# Altium PCB Glucometer-I.C.-Amp Test- V1.PcbDoc
Units mm, origin at the board's own origin, x right, y up, seen from the top; angles counter-clockwise.
Board outline 40.28 x 22.25 mm, 2 copper layers (Top Layer, Bottom Layer); 11 components, 11 nets, 52 pads, 7 vias.
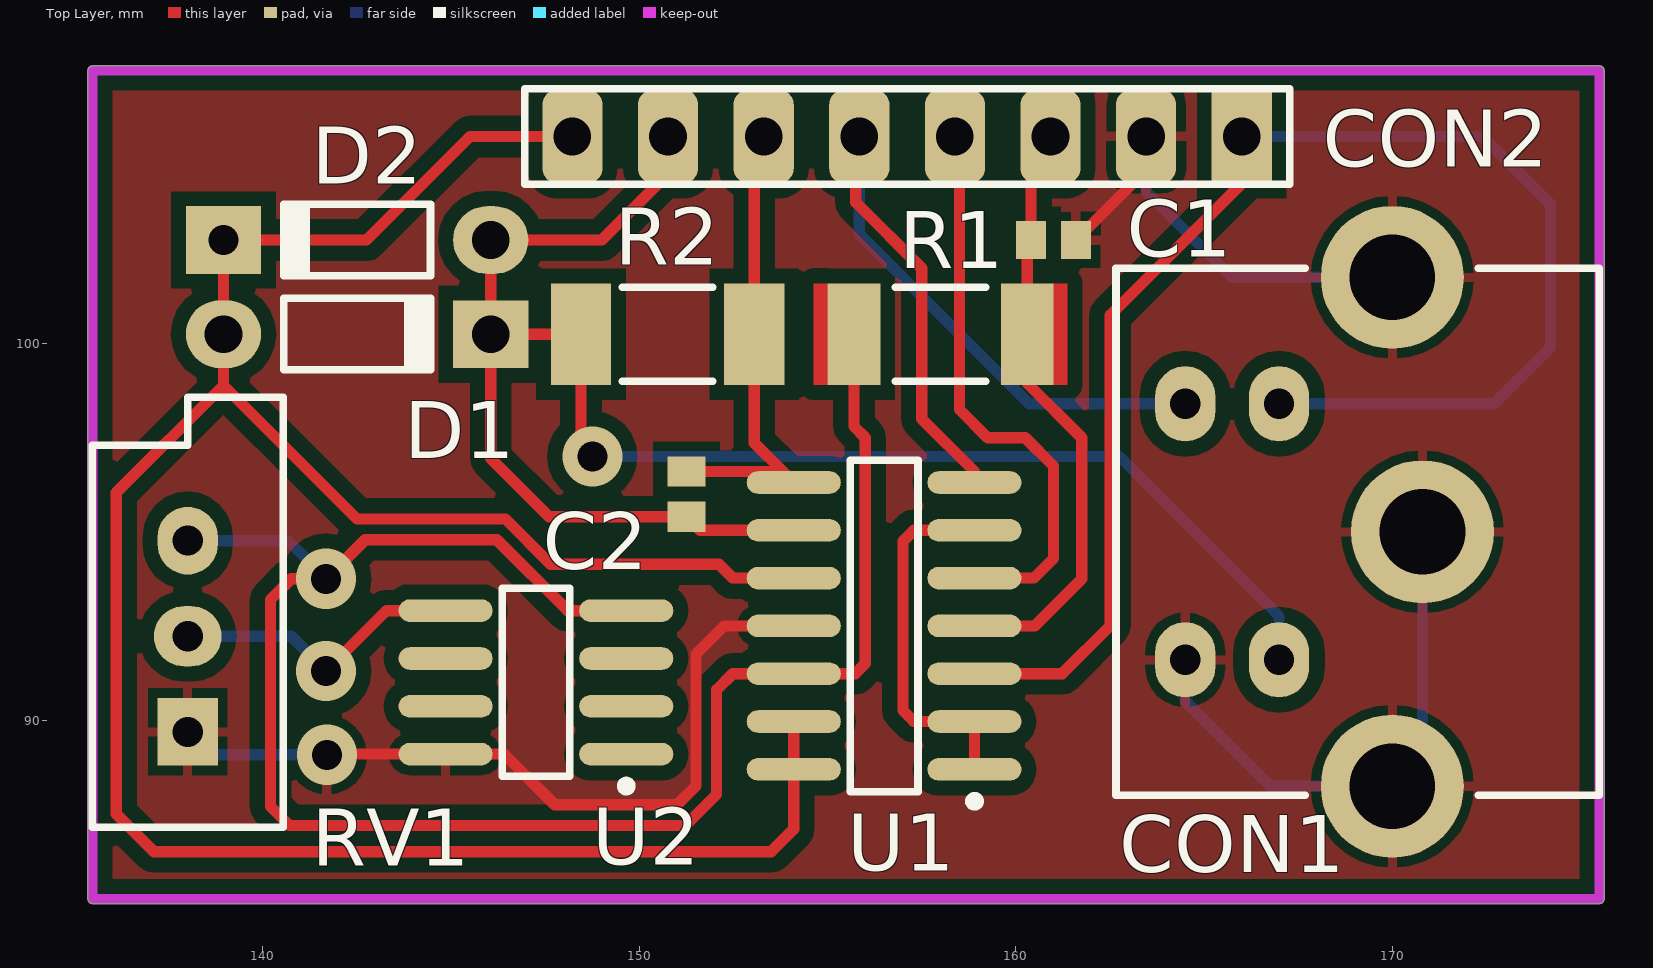
[diagram p0: Top Layer view]
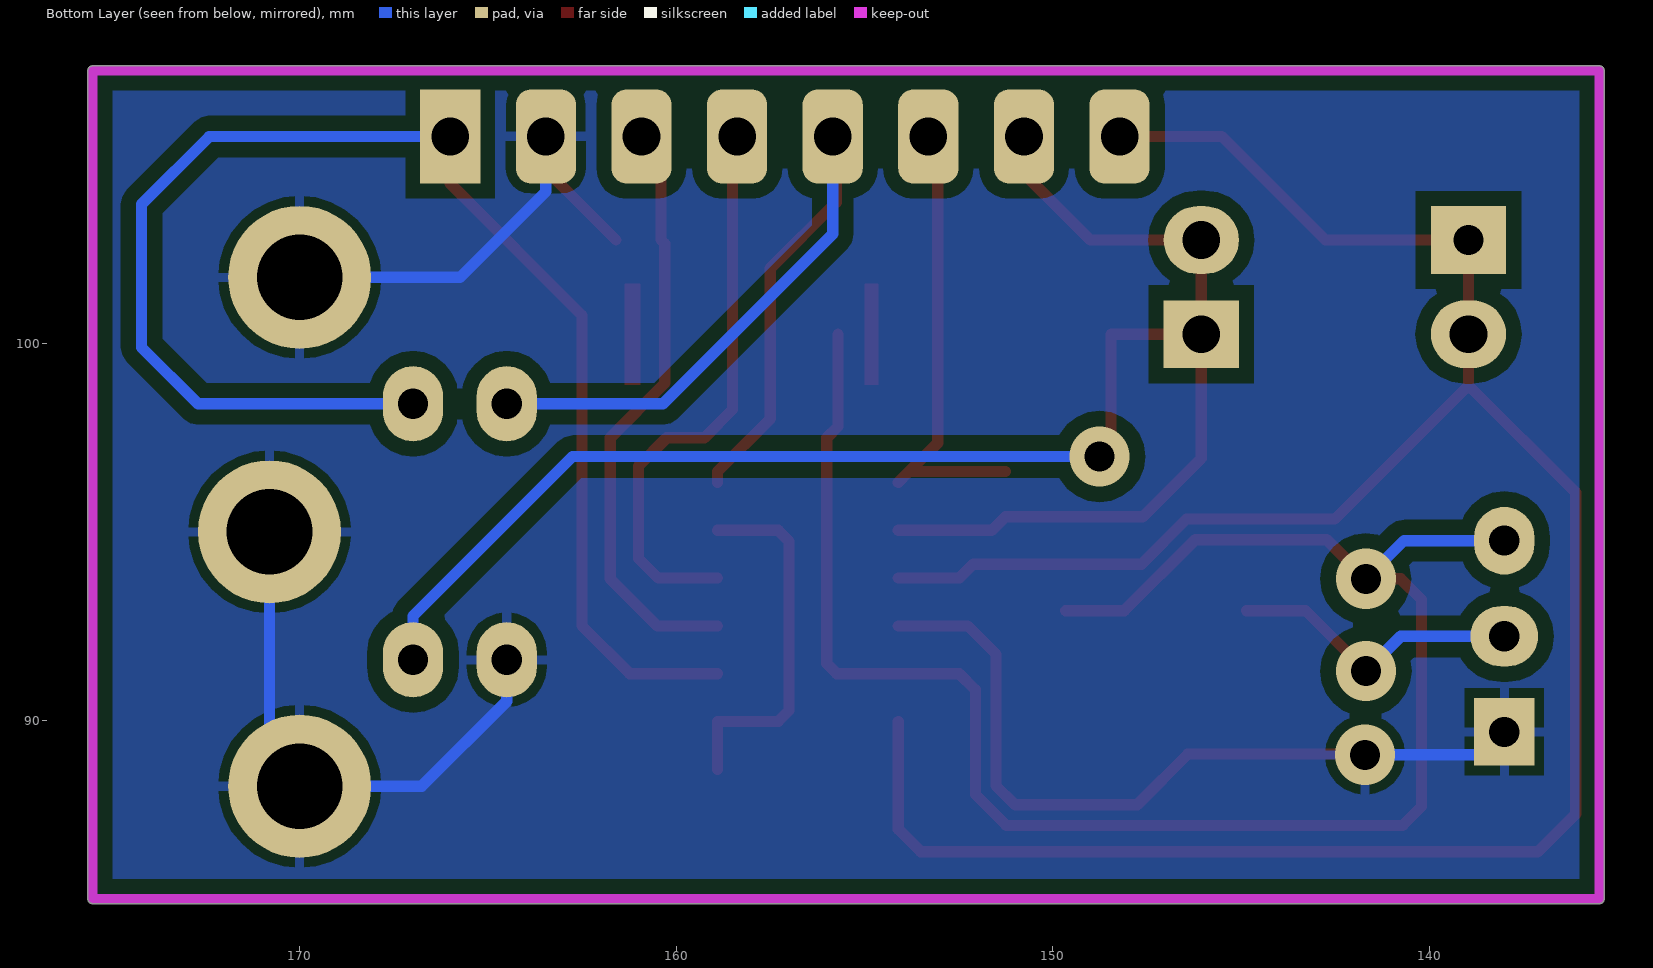
[diagram p1: Bottom Layer view, seen from below]

## Layer stack, top to bottom
Top Layer: signal copper 0.0356
Dielectric: dielectric 0.32, FR-4, Dk 4.8
Bottom Layer: signal copper 0.0356

## Board outline
135.348,85.25 ccw(c135.475,85.25) 135.475,85.123 175.5,85.123 ccw(c175.5,85.25) 175.627,85.25 175.627,107.25 ccw(c175.5,107.25) 175.5,107.377 135.475,107.377 ccw(c135.475,107.25) 135.348,107.25

## Design rules (kind name [scope] priority, off if disabled: settings)
AssemblyTestPointUsage AssemblyTestPointUsage_1 [All] p2:
AssemblyTestpoint AssemblyTestpoint_1 [All] p2: testpointundercomponent=TRUE minsize=1.016 maxsize=2.54 preferedsize=1.524 minholesize=0 maxholesize=1.016 preferedholesize=0.813 testpointgrid=0.025 usegrid=TRUE gridtolerance=0 allowsidetop=TRUE allowsidebottom=TRUE
Clearance [All] p1: gap=0.25
ComponentClearance ComponentClearance_1 [All] p2: gap=0.254 collisioncheckmode=3 verticalgap=0.254 showdistances=FALSE
DiffPairsRouting DiffPairsRouting_1 [All] p2: maxlimit=0.254 minlimit=0.254 mostfreqgap=0.254 maxuncoupledlength=12.7
FabricationTestPointUsage TestPointUsage [All] p2: valid=0 allowmultiple=FALSE
FabricationTestpoint Testpoint [All] p2: side=3 testpointundercomponent=TRUE minsize=1.016 maxsize=2.54 preferedsize=1.524 minholesize=0 maxholesize=1.016 preferedholesize=0.813 testpointgrid=0.025 allowsidetop=TRUE allowsidebottom=TRUE usegrid=TRUE gridtolerance=0
FanoutControl Fanout_LCC [IsLCC] p1: bgadir=Out bgaviamode=Centered fanoutstyle=Auto fanoutdirection=Alternating viagrid=0.025 // Fanout_LCC (Default Rule)
FanoutControl Fanout_BGA [IsBGA] p2: bgadir=Out bgaviamode=Centered fanoutstyle=Auto fanoutdirection=Alternating viagrid=0.025 // Fanout_BGA (Default Rule)
FanoutControl Fanout_Default [All] p4: bgadir=Out bgaviamode=Centered fanoutstyle=Auto fanoutdirection=Alternating viagrid=0.025 // Fanout_Default (Default Rule)
FanoutControl Fanout_Small [(CompPinCount < 5)] p5: bgadir=Out bgaviamode=Centered fanoutstyle=Auto fanoutdirection=OutThenIn viagrid=0.025 // Fanout_Small (Default Rule)
FanoutControl Fanout_BGA_1 [IsBGA] p6: bgadir=Out bgaviamode=Centered fanoutstyle=Auto fanoutdirection=Alternating viagrid=0.025 // Fanout_BGA (Default Rule)
FanoutControl Fanout_LCC_1 [IsLCC] p7: bgadir=Out bgaviamode=Centered fanoutstyle=Auto fanoutdirection=Alternating viagrid=0.025 // Fanout_LCC (Default Rule)
FanoutControl Fanout_SOIC_1 [IsSOIC] p8: bgadir=Out bgaviamode=Centered fanoutstyle=Auto fanoutdirection=Alternating viagrid=0.025 // Fanout_SOIC (Default Rule)
FanoutControl Fanout_Small_1 [(CompPinCount < 5)] p9: bgadir=Out bgaviamode=Centered fanoutstyle=Auto fanoutdirection=OutThenIn viagrid=0.025 // Fanout_Small (Default Rule)
FanoutControl Fanout_Default_1 [All] p10: bgadir=Out bgaviamode=Centered fanoutstyle=Auto fanoutdirection=Alternating viagrid=0.025 // Fanout_Default (Default Rule)
Height Height_1 [All] p2: minheight=0 maxheight=25.4 prefheight=12.7
HoleSize [All] p1: absolutevalues=TRUE maxlimit=5 minlimit=0.025 maxpercent=80.000 minpercent=20.000
HoleSize HoleSize_1 [All] p2: absolutevalues=TRUE maxlimit=5 minlimit=0.025 maxpercent=80.000 minpercent=20.000
HoleToHoleClearance HoleToHoleClearance_1 [All] p2: gap=0.254 allowstackedmicrovias=TRUE
LayerPairs LayerPairs_1 [All] p2: enforce=TRUE
MinimumSolderMaskSliver MinimumSolderMaskSliver_1 [All] p2: minsoldermaskwidth=0.254
NetAntennae NetAntennae_1 [All] p2: netantennaetolerance=0
PasteMaskExpansion PasteMaskExpansion_1 [All] p2: expansion=0
PlaneClearance PlaneClearance_1 [All] p2: clearance=0.508
PolygonConnect [All] p1: connectstyle=Relief reliefconductorwidth=0.254 reliefentries=4 polygonreliefangle="90 Angle" airgapwidth=0.254
PolygonConnect PolygonConnect_1 [All] p2: connectstyle=Relief reliefconductorwidth=0.254 reliefentries=4 polygonreliefangle="90 Angle" airgapwidth=0.254
RoutingPriority RoutingPriority_1 [All] p2: routingpriority=0
RoutingTopology RoutingTopology_1 [All] p2: topology=Shortest
RoutingVias [All] p1: holewidth=0.8 width=1.5 viastyle="Through Hole" minholewidth=0.7 minwidth=1 maxholewidth=1 maxwidth=2
ShortCircuit ShortCircuit_1 [All] p2: allowed=FALSE
SilkToSilkClearance SilkToSilkClearance_1 [All] p2: silktosilkclearance=0.254
SilkToSolderMaskClearance SilkscreenOverComponentPads [IsPad] p2: minsilkscreentomaskgap=0.254 clearancetoexposedcopper=TRUE
SolderMaskExpansion [All] p1: expansion=0.102
SolderMaskExpansion SolderMaskExpansion_1 [All] p2: expansion=0.102
UnRoutedNet UnRoutedNet_1 [All] p2:
Width [All] p1: maxlimit=5 minlimit=0.25 preferedwidth=0.3 minimp=50.000000 maximp=50.000000 favimp=50.000000
23 further rules are at their usual default settings.

## Components (designator, comment, footprint, x,y, rotation, side; value= is the part's Value field where it differs from the comment)
C1 "Cap2" CAPC1005N 161,102.75 r0 top
C2 "Cap2" CAPC1005N 151.25,96 r90 top
CON1 "" CDIN2.6-3H4A 175.5,95 r180 top
CON2 "Header 8" HDR1X8 166,105.5 r180 top
D1 "1N4148" DO-35#1 142.5,100.25 r0 top
D2 "1N4148" DO-35#2 142.5,102.75 r180 top
R1 "Res1" RESC5025N#1 158,100.25 r0 top
R2 "Res1" RESC5025N#2 150.75,100.25 r180 top
RV1 "RPot" VR5 138,92.225 r90 top
U1 "LMC6044IN" M14A_N 156.5,92.5 r180 top
U2 "LM385BM" M08A_N 147.25,91 r180 top

## Footprints (in the part's own frame and the unit in brackets; to place one, negate y for a bottom-side part, rotate by r counter-clockwise, add the part's x,y. Pads: shape width x height; smd on the part's side, far side on the other; paste and mask are expansions set on the pad)
CAPC1005N [mm] "Chip Capacitor, Body 1.0x0.5mm, IPC Medium Density"
  rect 0.8x1 smd: 1(-0.6,0) 2(0.6,0)
  body extent -0.55,-0.3 0.55,0.3, height 0.6
CDIN2.6-3H4A [mm] "Connector; Circular DIN, Thru-Hole; 4 Position; Right Angle; Pitch 2.1/2.6 mm; Body 14 x 12.84 x 13 mm (WxTxH), Shielded, Special PCB Retention"
  oval 1.6x2 hole 0.8: 1(8.51,-3.4) 2(8.51,3.4) 3(11,-3.4) 4(11,3.4)
  round 3.8 hole 2.28: MH1(5.5,-6.76) MH2(4.7,0) MH3(5.5,6.76)
  silkscreen extent 0,-7 12.84,7, body extent 0,-7 12.84,7, height 13
DO-35#1 [mm] "Diode, Axial; Body 3.8 x 1.9 mm (LxDia. max), Lead Dia. 0.53 mm (max)"
  oval 2x1.8 hole 1: 1(-3.55,0)
  rect 2x1.8 hole 1: 2(3.55,0)
  silkscreen extent -1.95,-0.95 2.05,0.95
DO-35#2 [mm] "Diode, Axial; Body 3.8 x 1.9 mm (LxDia. max), Lead Dia. 0.53 mm (max)"
  oval 2x1.8 hole 1: 1(-3.55,0)
  rect 2x1.8 hole 0.8: 2(3.55,0)
  silkscreen extent -1.95,-0.95 2.05,0.95
HDR1X8 [mm] "Connector; Header; 8 Position"
  rect 1.6x2.5 hole 1: 1(0,0)
  rrect50% 1.6x2.5 hole 1: 2(2.54,0) 3(5.08,0) 4(7.62,0) 5(10.16,0) 6(12.7,0) 7(15.24,0) 8(17.78,0)
  silkscreen extent -1.27,-1.27 19.05,1.27
M08A_N [mm] "SOIC, 8-Leads, Body 4.9x3.9mm, Pitch 1.27mm, IPC Medium Density"
  oval 2.5x0.6 smd: 1(-2.4,1.905) 2(-2.4,0.635) 3(-2.4,-0.635) 4(-2.4,-1.905) 5(2.4,-1.905) 6(2.4,-0.635) 7(2.4,0.635) 8(2.4,1.905)
  silkscreen extent -2.53,-2.5 0.9,2.88, body extent -2,-2.5 2,2.5, height 1.75
M14A_N [mm] "SOIC, 14-Leads, Body 8.6x3.9mm, Pitch 1.27mm, IPC Medium Density"
  oval 2.5x0.6 smd: 1(-2.4,3.81) 2(-2.4,2.54) 3(-2.4,1.27) 4(-2.4,0) 5(-2.4,-1.27) 6(-2.4,-2.54) 7(-2.4,-3.81) 8(2.4,-3.81) 9(2.4,-2.54) 10(2.4,-1.27) 11(2.4,0) 12(2.4,1.27) 13(2.4,2.54) 14(2.4,3.81)
  silkscreen extent -2.53,-4.4 0.9,4.78, body extent -2,-4.38 2,4.38, height 1.75
RESC5025N#1 [mm] "Chip Resistor, Body 5.0x2.5mm, IPC Medium Density"
  rect 1.4x2.7 smd: 1(-2.3,0) 2(2.3,0)
  silkscreen extent -1.2,-1.25 1.2,1.25, body extent -2.58,-1.33 2.58,1.33, height 0.71
RESC5025N#2 [mm] "Chip Resistor, Body 5.0x2.5mm, IPC Medium Density"
  rect 1.6x2.7 smd: 1(-2.3,0) 2(2.3,0)
  silkscreen extent -1.2,-1.25 1.2,1.25, body extent -2.58,-1.33 2.58,1.33, height 0.71
VR5 [mm] "Thru-Hole; 3 Leads"
  rect 1.8x1.6 hole 0.8: 1(-2.54,0)
  oval 1.6x1.8 hole 0.8: 2(0,0)
  oval 1.8x1.6 hole 0.8: 3(2.54,0)
  silkscreen extent -5.08,-2.54 6.35,2.54

## Part data
C1 C2: "Capacitor"
CON1: library part "MiniDin 4Pins - SuperVideo", "MiniDin 4 Pins"
CON2: "Header, 8-Pin"
D1 D2: "High Conductance Fast Diode"
R1 R2: "Resistor"
RV1: "Potentiometer"
U1: "CMOS Quad Micropower Operational Amplifier, 14-pin MDIP"
U2: "Adjustable Micropower Voltage Reference, 8-pin Narrow SOIC"

## Via types
v1: diameter 1.6, hole 0.8, Top Layer to Bottom Layer, 4 vias
v2: diameter 1.27, hole 0.711, Top Layer to Bottom Layer, 3 vias

## Nets (pads, with @x,y where several pads share a name; then routed paths per layer and width w, separated by ;. In a path a pad name is that pad's centre, name@x,y a point inside that pad or via, vN(x,y) a via of type N, cw(c..) or ccw(c..) an arc to the next point about the centre after c; other vN are vias at no path point)
5V: C1.1 CON2.3 R1.2 U1.4 | length 16
  Top Layer w0.3: U1.4 160.5,92.5 161.75,93.75 161.75,97.5 160.3,98.95 R1.2 160.3,102.65 C1.1 160.4,104.98 CON2.3
GND: C1.2 CON1.4 CON1.MH1 CON1.MH2 CON1.MH3 CON2.2 RV1.1 U1.11 U2.8 | length 48
  Top Layer w0.3: v1@141.7,89.095 U2.8 146.405,89.095 147.75,87.75 151,87.75 151.5,88.25 151.5,91.75 152.25,92.5 U1.11 ; C1.2 163.46,104.61 v2(163.46,105.5)
  Bottom Layer w0.3: RV1.1 138.61,89.075 v1(141.7,89.075) ; v2(163.46,105.5) 163.46,104.04 165.74,101.76 CON1.MH1 ; CON1.4 164.5,90.5 166.76,88.24 CON1.MH3 170.8,89.04 CON1.MH2
NetC2_1: C2.1 CON1.2 CON2.7 D1.2 D2.1 R2.2 U1.9 | length 48
  Top Layer w0.3: v1(148.75,97) 148.45,97.3 R2.2 D1.2 ; CON2.7 150.76,104.51 149,102.75 D2.1 D1.2 ; U1.9 151.61,95.04 C2.1 147.6,95.4 146.05,96.95 D1.2
  Bottom Layer w0.3: v1(148.75,97) 162.75,97 166.99,92.76 CON1.2
NetC2_2: C2.2 CON2.6 R2.1 U1.8 | length 12.3
  Top Layer w0.3: C2.2 U1.8@153.81,96.6 ; CON2.6 153.05,105.25 R2.1 153.05,97.36 U1.8@153.81,96.6 ; U1.8 U1.8@153.81,96.6
NetCON1_1: CON1.1 CON2.1 U1.3 | length 39.2
  Top Layer w0.3: U1.3 161.23,91.23 162.5,92.5 162.5,100.75 166,104.25 v2(166,105.5)
  Bottom Layer w0.3: v2(166,105.5) 172.4,105.5 174.2,103.7 174.2,99.9 172.7,98.4 CON1.1
NetCON1_3: CON1.3 CON2.5 U1.7 | length 23.7
  Top Layer w0.3: v2(155.84,105.5) 155.75,105.41 155.75,103.75 157.5,102 157.5,98 158.9,96.6 U1.7
  Bottom Layer w0.3: v2(155.84,105.5) 155.84,102.91 160.35,98.4 CON1.3
NetCON2_4: CON2.4 U1.5 | length 15.2
  Top Layer w0.3: CON2.4 158.5,105.38 158.5,98.25 159.25,97.5 160.25,97.5 161,96.75 161,94.29 160.48,93.77 U1.5
NetR1_1: R1.1 RV1.3 U1.12 U2.4 | length 48.8
  Top Layer w0.3: U2.4 148.095,92.905 146.21,94.79 142.715,94.79 v1(141.675,93.75) 140.75,93.75 140.2,93.2 140.2,87.7 140.7,87.2 151.228,87.2 152.05,88.022 152.05,90.8 152.48,91.23 U1.12 155.73,91.23 156,91.5 156,97.5 155.7,97.8 R1.1
  Bottom Layer w0.3: RV1.3 140.66,94.765 v1(141.675,93.75)
NetRV1_3: RV1.2 U2.5 | length 7.9
  Top Layer w0.3: v1(141.675,91.3) 143.28,92.905 U2.5
  Bottom Layer w0.3: RV1.2 140.75,92.225 v1(141.675,91.3)
NetU1_1: U1.1 U1.2 U1.6 | length 9.8
  Top Layer w0.3: U1.1 U1.2 157.29,89.96 157,90.25 157,94.75 157.29,95.04 U1.6
VGND: CON2.8 D1.1 D2.2 U1.10 U1.13 U1.14 | length 65.6
  Top Layer w0.3: CON2.8 145.5,105.5 142.75,102.75 D2.2 D1.1 138.95,98.89 ; U1.13 U1.14 154.1,87.1 153.5,86.5 137.102,86.5 136.1,87.502 136.1,96.04 138.95,98.89 ; U1.10 152.48,93.77 152.111,94.139 147.639,94.139 146.438,95.34 142.5,95.34 141.09,96.75 138.95,98.89
pads on no net: U2.1 U2.2 U2.3 U2.6 U2.7

## Polygon pours and split planes (outlines as drawn)
GND on Bottom Layer "Bottom Layer-No Net" (solid, pour order 16): 175.5,107.25 135.475,107.25 135.475,85.25 175.5,85.25 175.5,107.25
GND on Top Layer "Bottom Layer-No Net" (solid, pour order 18): 175.5,107.25 135.475,107.25 135.475,85.25 175.5,85.25 175.5,107.25

## Keep-outs
Keep-Out Layer:
  lines w0.254: 135.475,85.25 135.475,107.25 175.5,107.25 175.5,85.25 135.475,85.25

## Other copper
Top Layer:
  rectangle net 5V: 160.95,98.9 161.375,101.6
  rectangle net NetR1_1: 154.625,98.9 155,101.6

## Silkscreen, mask and mechanical layers (free items; w line width, h text height)
Mechanical 16:
  lines w0.127: 0,53.975 5.08,53.975 ; 0,107.95 5.08,107.95 ; 0,161.925 5.08,161.925 ; 69.85,0 69.85,5.08 ; 69.85,210.82 69.85,215.9 ; 139.7,0 139.7,5.08 ; 139.7,210.82 139.7,215.9 ; 209.55,0 209.55,5.08 ; 209.55,210.82 209.55,215.9 ; 274.32,53.975 279.4,53.975 ; 274.32,107.95 279.4,107.95 ; 274.32,161.925 279.4,161.925 ; 0,0 279.4,0 279.4,215.9 0,215.9 0,0 ; 5.08,5.08 5.08,210.82 274.32,210.82 274.32,5.08 5.08,5.08
  text "1" at 34.324,212.471 h1.78
  text "2" at 104.191,212.471 h1.78
  text "3" at 173.914,212.471 h1.78
  text "4" at 243.789,212.471 h1.78
  text "A" at 1.905,186.614 h1.78
  text "A" at 276.225,186.614 h1.78
  text "B" at 1.905,132.639 h1.78
  text "B" at 276.225,132.639 h1.78
  text "C" at 1.905,78.664 h1.78
  text "C" at 276.225,78.664 h1.78
  text "D" at 1.905,24.816 h1.78
  text "D" at 276.225,24.816 h1.78
  text "1" at 34.324,1.651 h1.78
  text "2" at 104.191,1.651 h1.78
  text "3" at 173.914,1.651 h1.78
  text "4" at 243.789,1.651 h1.78

## Dimensions
135.475,107.25 to 175.5,107.25 on Keep-Out Layer
135.475,107.25 to 135.475,85.25 on Keep-Out Layer

## Text inside footprints (layer, text, board x,y; h text height)
CON1: Mechanical 1 "PCB Edge" at 174.9,101.7 h0.25 r270